# EAGLE board Sensor board v11 (EAGLE 9.7.0)
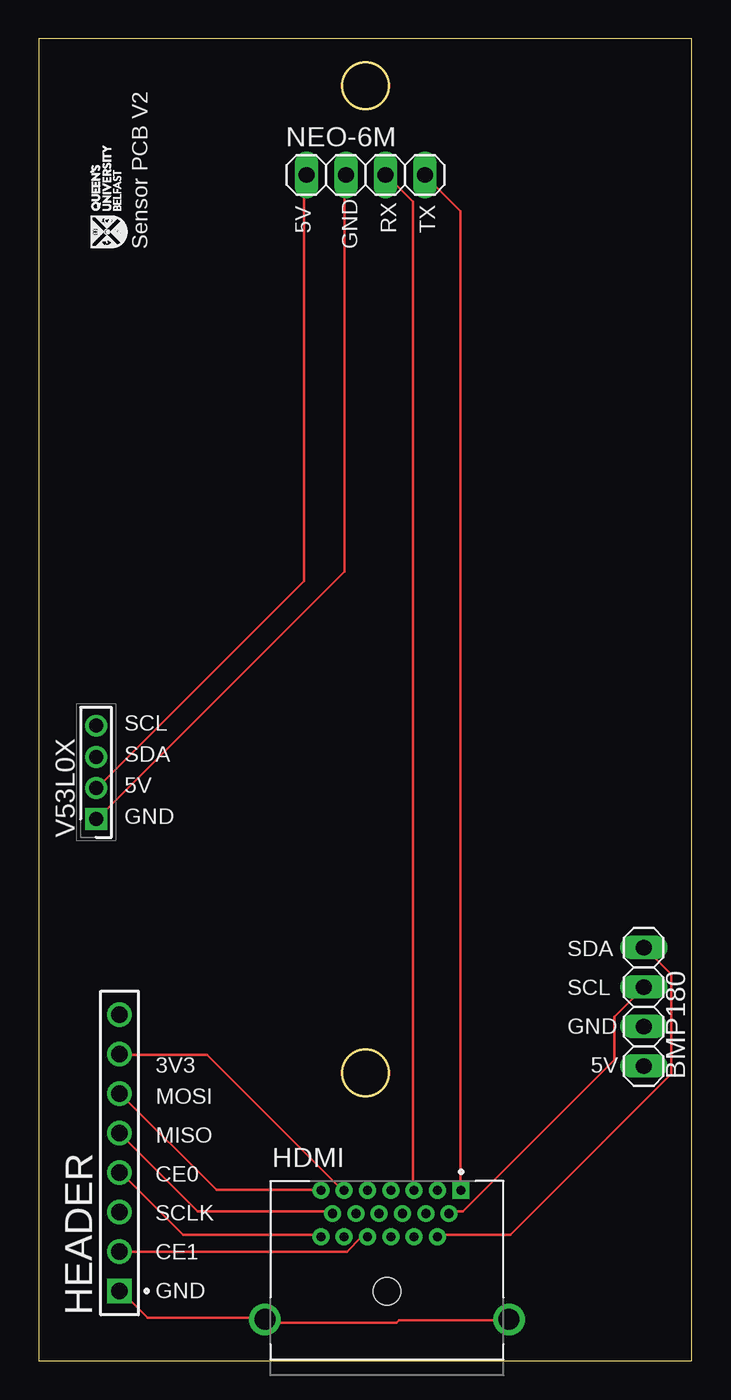
[diagram p0: board, top side]
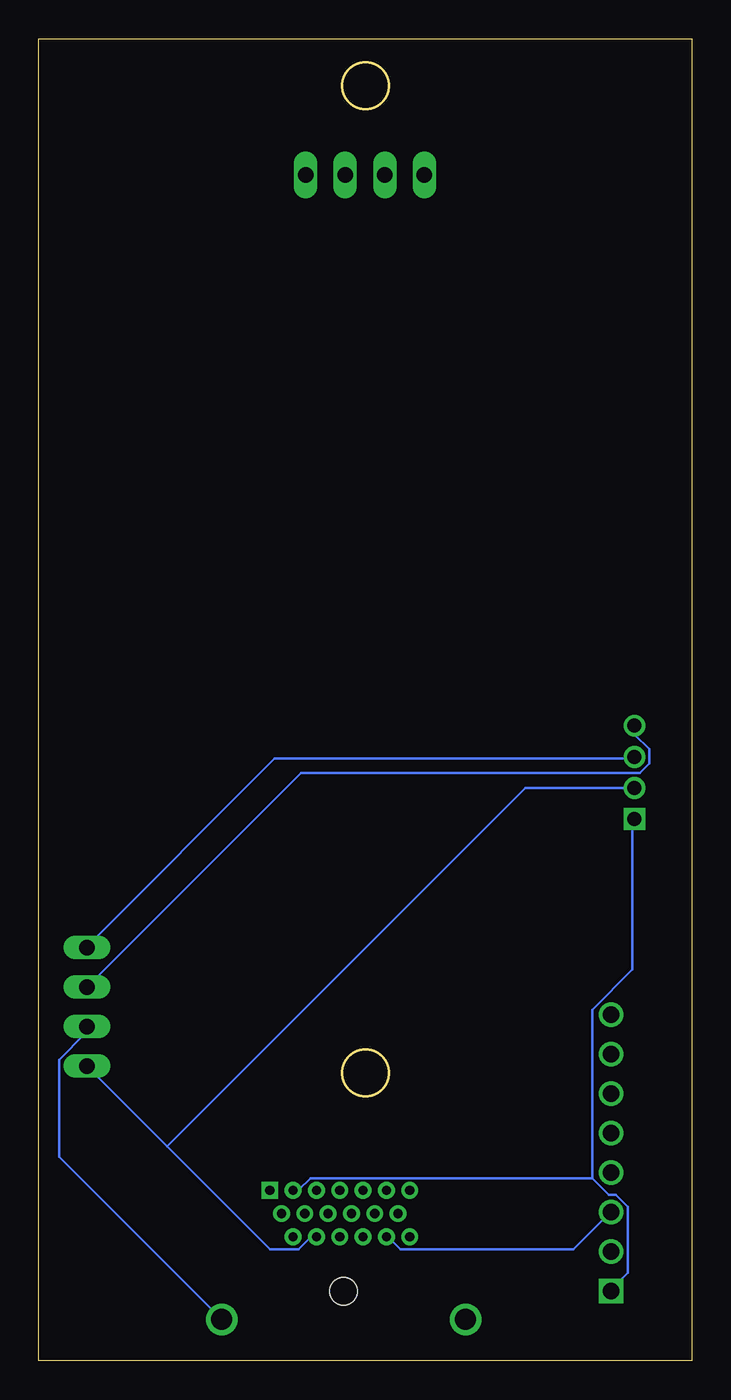
[diagram p1: board, bottom side, seen from below]

Size 42 x 85 mm. Coordinates in mm from the lower left corner, seen from the top.
Outline: 0,0 42,0 42,85 0,85 0,0
Copper layers (1*16): Top / Bottom
Stack-up Default Layer Stack: Top User Defined 0.035mm / Dielectric-1 User Defined 1.5mm / Bottom User Defined 0.035mm
Design rules "default": minimum track width 6mil, minimum drill 0.35mm, track to track 6mil, track to pad 6mil, pad to pad 6mil, via to via 6mil, smd to smd 6mil, copper to edge 40mil, drill to drill 6mil, minimum pad ring 10mil, minimum via ring 8mil, stop-mask expansion 4mil, vias tented up to drill 0mil, thermal gap 10mil
Milling: area 19.5,80.5 to 22.5,83.5; area 19.5,17 to 22.5,20

## Footprints (pad centres in the part's own frame; a part is rotated, then mirrored left to right if it is on the bottom)
1X04 = drill 1.016 long: 1 -3.81,0; 2 -1.27,0; 3 1.27,0; 4 3.81,0
VALCON_51L-019S-036-DNA1 = drill 0.58 square: 1 4.75,5.65 | drill 0.58: 2 4,4.15; 3 3.25,5.65; 4 3.25,2.65; 5 2.5,4.15; 6 1.75,2.65; 7 1.75,5.65; 8 1,4.15; 9 0.25,5.65; 10 0.25,2.65; 11 -0.5,4.15; 12 -1.25,2.65; 13 -1.25,5.65; 14 -2,4.15; 15 -2.75,5.65; 16 -2.75,2.65; 17 -3.5,4.15; 18 -4.25,2.65; 19 -4.25,5.65 | drill 1.35: S1 -7.85,-2.65; S2 7.85,-2.65 | hole 1.75: 0,-0.85
SAMTEC_SSW-108-XX-X-S = drill 1.04 square: 01 -8.89,0 | drill 1.04: 02 -6.35,0; 03 -3.81,0; 04 -1.27,0; 05 1.27,0; 06 3.81,0; 07 6.35,0; 08 8.89,0
HDRV4W50P0X200_1X4_800X200X525 = drill 0.9 pad 1.35 square: 1 0,0 | drill 0.9 pad 1.35: 2 2,0; 3 4,0; 4 6,0

## Placement (x,y rotation side)
BMP180  PINHD-1X4  [1X04]  38.91,22.75 90 top
HDMI  51L-019S-036-DNA1  [VALCON_51L-019S-036-DNA1]  22.39,5.31 0 top
HEADER  SSW-108-XX-X-S  [SAMTEC_SSW-108-XX-X-S]  5.19,13.36 90 top
NEO-6M  PINHD-1X4  [1X04]  21.02,76.25 0 top
V53L0X  M22-2510405  [HDRV4W50P0X200_1X4_800X200X525]  3.68,34.83 90 top

## Library data of the parts
BMP180 NEO-6M = Connector; CATEGORY: CONNECTOR; SUB-CATEGORY: PIN-HEADER
HDMI = 51L-019S-036-DNA1; MANUFACTURER: Valcon; MAXIMUM_PACKAGE_HEIGHT: 15.4mm; PARTREV: 27 Apr, 2021; STANDARD: Manufacturer recommendations
HEADER = SSW-108-XX-X-S; MANUFACTURER: Samtec; PARTREV: A; STANDARD: Manufacturer Recommendations
V53L0X = M22-2510405; DESCRIPTION: 2.00mm (0.079") Pitch SIL Vertical 2.4mm Throughboard Pin Header, 3.5mm mating pin height, gold, 4 contacts; HEIGHT: 5.25mm; MANUFACTURER_NAME: Harwin; MANUFACTURER_PART_NUMBER: M22-2510405; MOUSER_PART_NUMBER: 855-M22-2510405; MOUSER_PRICE-STOCK: https://www.mouser.co.uk/ProductDetail/Harwin/M22-2510405?qs=vF78I%252BjhbY9z7PsFZBZ5CA%3D%3D

## Nets
3V3: HDMI.15 HEADER.07
5V: BMP180.1 HDMI.6 NEO-6M.1 V53L0X.2
CE0: HDMI.18 HEADER.04
CE1: HDMI.12 HEADER.02
GND: BMP180.2 HDMI.3 HDMI.S1 HDMI.S2 HEADER.01 NEO-6M.2 V53L0X.1
MISO: HDMI.17 HEADER.05
MOSI: HDMI.19 HEADER.06
RX: HDMI.7 NEO-6M.3
SCL: BMP180.3 HDMI.2 V53L0X.4
SCLK: HDMI.16 HEADER.03
SDA: BMP180.4 HDMI.4 V53L0X.3
TX: HDMI.1 NEO-6M.4

## Tracks (layer width: path | path; a pad name or v marks a point on that pad's centre or on a via)
3V3
  Top 0.152: HDMI.15 19.51,10.97 10.82,19.66 5.33,19.66 HEADER.07
5V
  Top 0.152: NEO-6M.1 17.07,76.2 17.07,50.14 3.81,36.88 V53L0X.2
  Bottom 0.152: 33.75,13.79 38.86,18.9 BMP180.1 | 33.75,13.79 27.13,7.16 25.3,7.16 24.54,7.92 24.23,7.92 HDMI.6 | 33.75,13.79 10.71,36.83 V53L0X.2
CE0
  Top 0.152: HDMI.18 18.14,8.08 9.3,8.08 5.33,12.04 HEADER.04
CE1
  Top 0.152: HDMI.12 21.03,7.92 20.73,7.92 19.81,7.01 5.33,7.01 HEADER.02
GND
  Top 0.152: NEO-6M.2 19.66,76.2 19.66,50.75 3.81,34.9 V53L0X.1 | HEADER.01 5.33,4.42 7.01,2.74 14.48,2.74 HDMI.S1 14.63,2.59 14.78,2.44 23.01,2.44 23.16,2.59 30.18,2.59 HDMI.S2
  Bottom 0.152: BMP180.2 39.01,21.34 39.01,21.03 40.69,19.36 40.69,13.11 30.33,2.74 HDMI.S2 | 6.4,11.73 24.54,11.73 25.3,10.97 25.6,10.97 HDMI.3 | 6.4,11.73 5.33,10.67 4.88,10.67 4.12,9.91 4.12,5.64 5.18,4.57 HEADER.01 | 6.4,11.73 6.4,22.55 3.81,25.15 3.81,34.75 V53L0X.1
MISO
  Top 0.152: HDMI.17 18.75,9.6 10.21,9.6 5.33,14.48 HEADER.05
MOSI
  Top 0.152: HDMI.19 18.14,10.97 11.43,10.97 5.33,17.07 HEADER.06
RX
  Top 0.152: HDMI.7 24.08,10.97 24.08,74.52 22.4,76.2 NEO-6M.3
SCL
  Top 0.152: HDMI.2 26.52,9.6 27.28,9.6 37.03,19.36 37.03,22.1 38.86,23.93 BMP180.3
  Bottom 0.152: V53L0X.4 3.66,40.69 3.66,40.23 2.74,39.32 2.74,38.41 3.35,37.8 25.15,37.8 38.86,24.08 BMP180.3
SCLK
  Bottom 0.152: HDMI.16 19.51,7.92 18.75,7.16 7.62,7.16 5.33,9.45 HEADER.03
SDA
  Top 0.152: HDMI.4 25.76,8.08 30.33,8.08 40.69,18.44 40.69,24.84 39.01,26.52 BMP180.4
  Bottom 0.152: V53L0X.3 3.81,38.71 26.82,38.71 38.86,26.67 BMP180.4
TX
  Top 0.152: HDMI.1 27.13,10.97 27.13,73.91 24.84,76.2 NEO-6M.4

## Text on the board
tNames: Sensor PCB V2 | 5V | GND | RX | TX | SCL | SDA | 5V | GND | SDA | SCL | GND | 3V3 | 5V | MOSI | MISO | CE0 | SCLK | CE1 | GND